# Altium PCB Altium_PCB_v03_02_PROTOCOL_ANALYZER_DUINO_4Plane.pcbdoc
Units mil, origin at the board's own origin, x right, y up, seen from the top; angles counter-clockwise.
Board outline 7547.34 x 3649.61 mil, 4 copper layers (Top Layer, GROUND, 5V, Bottom Layer); 17 components, 42 nets, 104 pads, 0 vias.
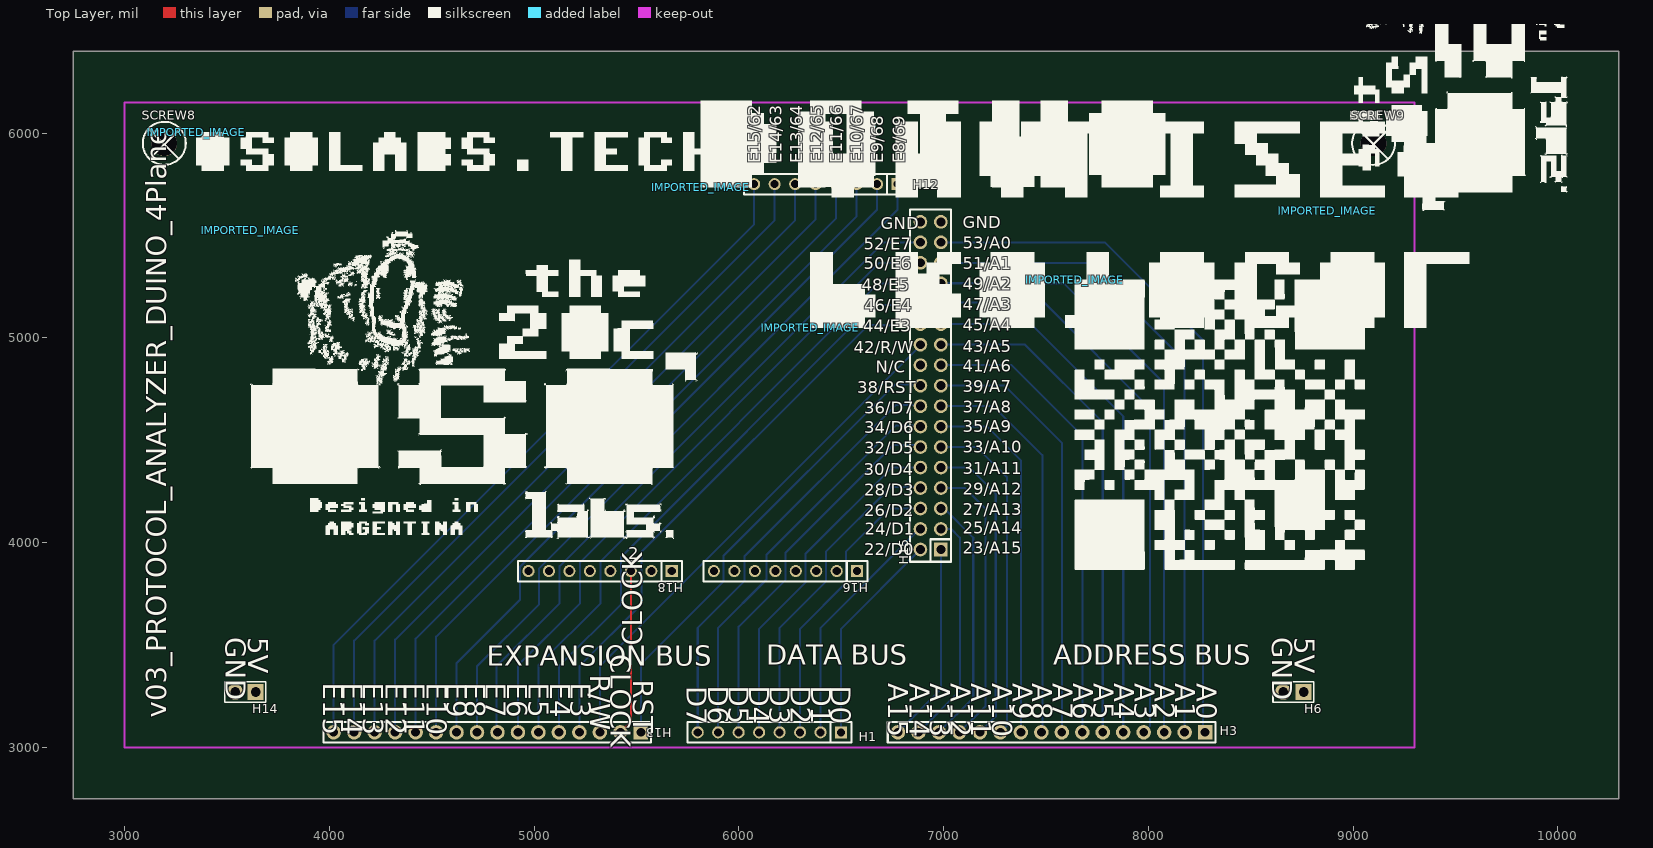
[diagram p0: Top Layer view]
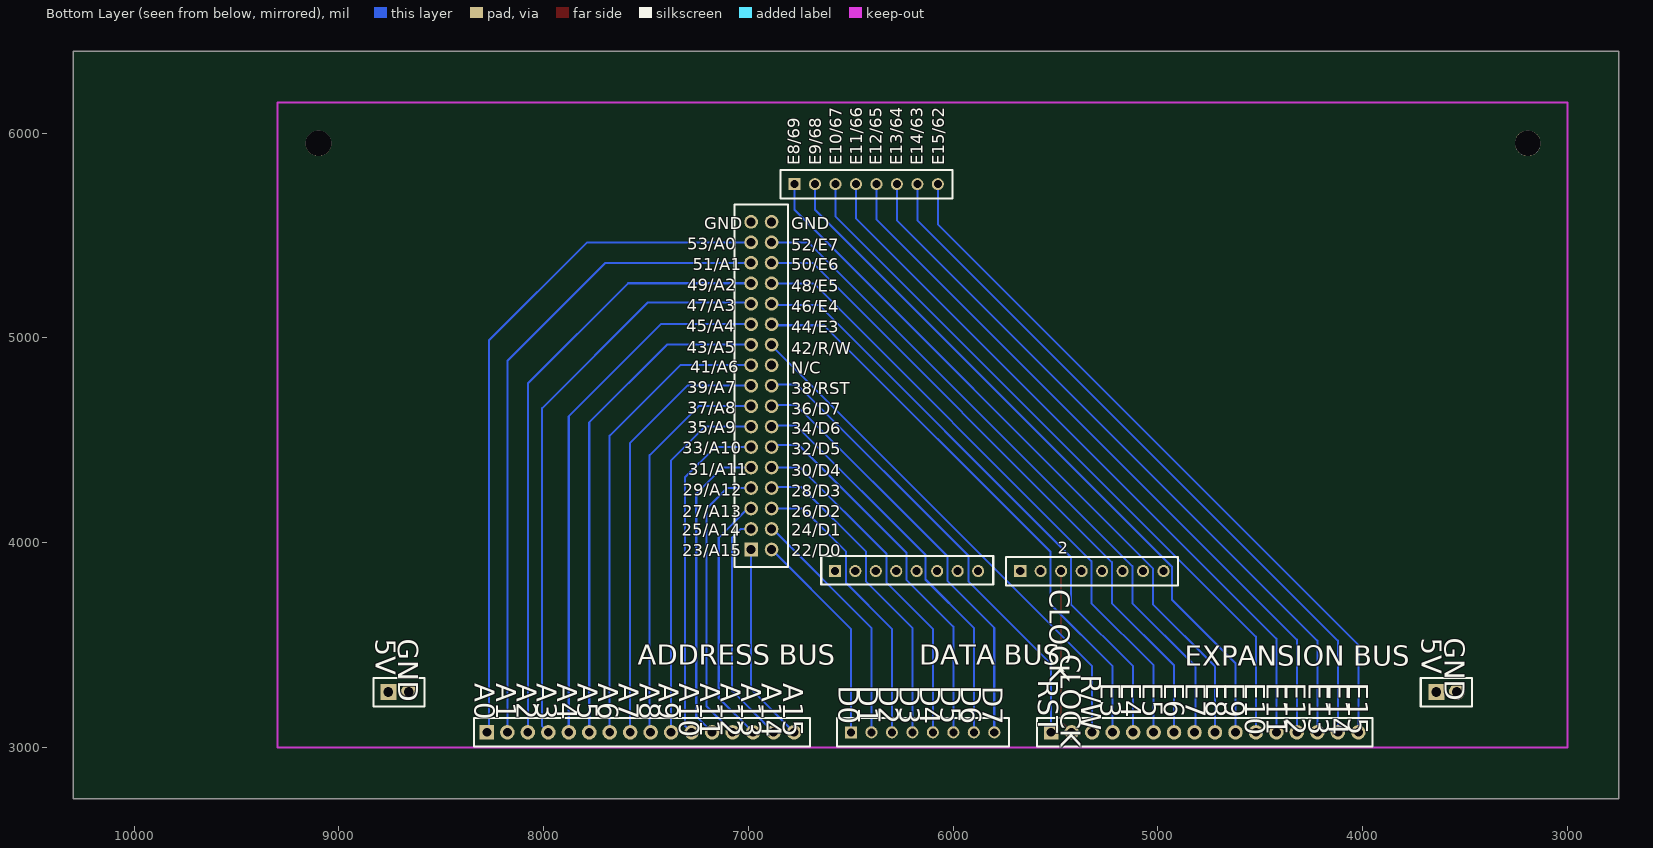
[diagram p1: Bottom Layer view, seen from below]
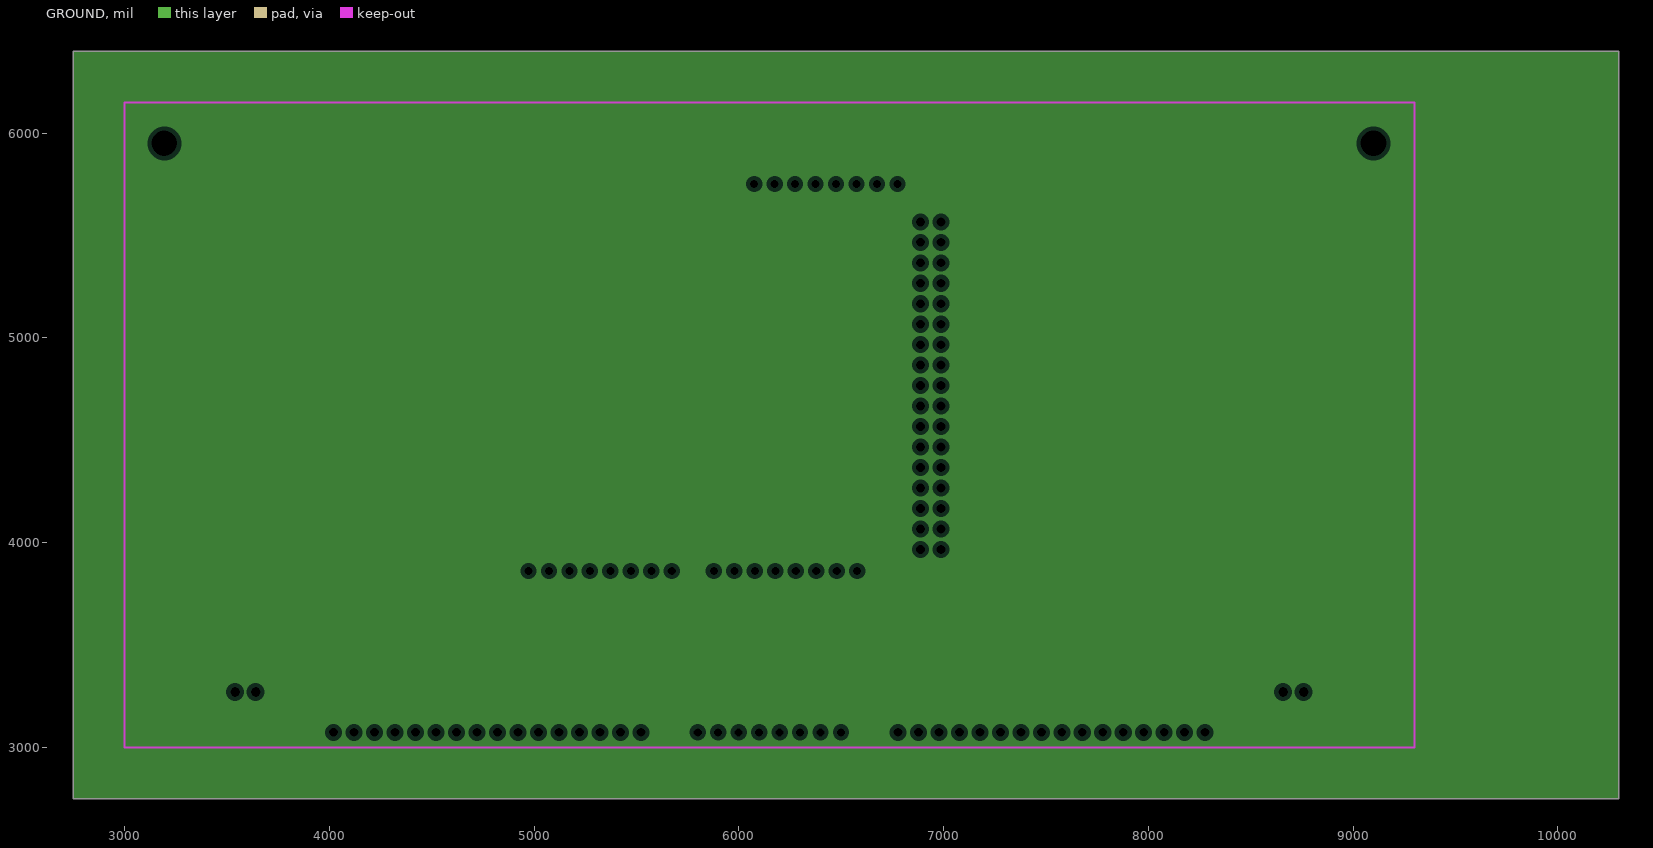
[diagram p2: GROUND, clearances drawn from the general rule]
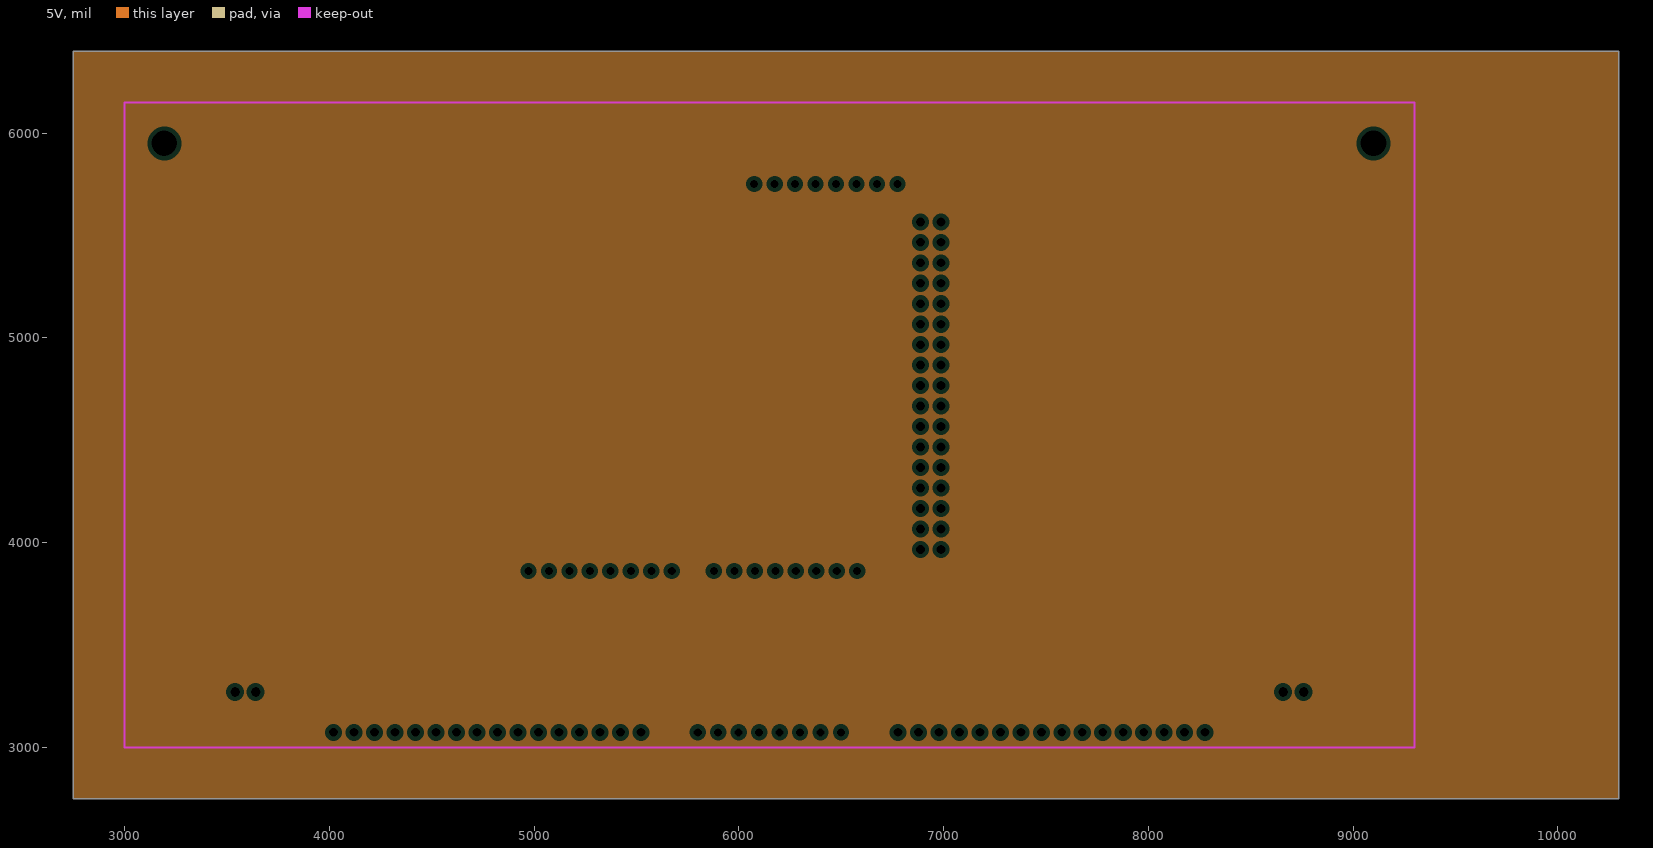
[diagram p3: 5V, clearances drawn from the general rule]

## Layer stack, top to bottom
Top Layer: signal copper (thickness not stored)
Dielectric: dielectric 12.6, FR-4, Dk 4.8
GROUND: plane copper (thickness not stored)
Dielectric: dielectric 12.6, FR-4, Dk 4.8
5V: plane copper (thickness not stored)
Dielectric: dielectric 12.6, FR-4, Dk 4.8
Bottom Layer: signal copper (thickness not stored)

## Board outline
10297.34,2750 2750,2750 2750,6399.61 10297.34,6399.61

## Design rules (kind name [scope] priority, off if disabled: settings)
BoardOutlineClearance copperThickness1oz [All] p0: genericclearance=10 ignorepadtopadclearanceinfootprint=FALSE except(0: Arc-SplitContinuation Track-SplitContinuation SMDPad-SplitContinuation THPad-SplitContinuation Via-SplitContinuation Fill-SplitContinuation Poly-SplitContinuation Region-SplitContinuation Text-SplitContinuation; 6: SMDPad-CutoutEdge THPad-CutoutEdge Via-CutoutEdge Fill-CutoutEdge Region-CutoutEdge; 11.8: Track-OutlineEdge SMDPad-OutlineEdge THPad-OutlineEdge Via-OutlineEdge Fill-OutlineEdge Region-OutlineEdge Poly-OutlineEdge Text-OutlineEdge Track-CutoutEdge)
BoardOutlineClearance copperThickness2oz [All] p0: genericclearance=10 ignorepadtopadclearanceinfootprint=FALSE except(0: Arc-SplitContinuation Track-SplitContinuation SMDPad-SplitContinuation THPad-SplitContinuation Via-SplitContinuation Fill-SplitContinuation Poly-SplitContinuation Region-SplitContinuation Text-SplitContinuation; 6: SMDPad-CutoutEdge THPad-CutoutEdge Via-CutoutEdge Fill-CutoutEdge Region-CutoutEdge; 11.8: Track-OutlineEdge SMDPad-OutlineEdge THPad-OutlineEdge Via-OutlineEdge Fill-OutlineEdge Region-OutlineEdge Poly-OutlineEdge Text-OutlineEdge Track-CutoutEdge)
Clearance copperThickness1oz [(InNet('A0') OR InNet('A1') OR InNet('A2') OR InNet('A3') OR InNet('A4') OR InNet('A5') OR InNet('A6') OR InNet('A7') OR InNet('A8') OR InNet('A9') OR InNet('A10') OR InNet('A11') OR InNet('A12') OR InNet('A13') OR InNet('A14') OR InNet('A15') OR InNet('5V') OR InNet('GROUND') OR InNet('D0') OR InNet('D1') OR InNet('D2') OR InNet('D3') OR InNet('D4') OR InNet('D5') OR InNet('D6') OR InNet('D7') OR InNet('RST') OR InNet('CLOCK') OR InNet('R/W') OR InNet('E3') OR InNet('E4') OR InNet('E5') OR InNet('E6') OR InNet('E7') OR InNet('E8') OR InNet('E9') OR InNet('E10') OR InNet('E11') OR InNet('E12') OR InNet('E13') OR InNet('E14') OR InNet('E15'))] p1: gap=7 ignorepadtopadclearanceinfootprint=FALSE except(4: Track-Track; 6: Track-SMDPad SMDPad-SMDPad Track-THPad SMDPad-THPad THPad-THPad Track-Via SMDPad-Via THPad-Via Via-Via Track-Fill SMDPad-Fill THPad-Fill Via-Fill Fill-Fill SMDPad-Region THPad-Region Via-Region Fill-Region Region-Region Track-Poly SMDPad-Poly THPad-Poly Via-Poly Fill-Poly Poly-Poly Track-Text SMDPad-Text THPad-Text Via-Text Fill-Text Region-Text Poly-Text Text-Text Track-Hole SMDPad-Hole THPad-Hole Via-Hole Fill-Hole Region-Hole Poly-Hole Text-Hole; 11.8: Track-Region Region-Poly Track-Sheet SMDPad-Sheet THPad-Sheet Via-Sheet Fill-Sheet Region-Sheet Poly-Sheet Text-Sheet Sheet-Hole)
Clearance copperThickness2oz [All] p1: gap=7 ignorepadtopadclearanceinfootprint=FALSE except(6: Track-SMDPad SMDPad-SMDPad Track-THPad SMDPad-THPad THPad-THPad Track-Via SMDPad-Via THPad-Via Via-Via Track-Fill SMDPad-Fill THPad-Fill Via-Fill Fill-Fill SMDPad-Region THPad-Region Via-Region Fill-Region Region-Region Track-Poly SMDPad-Poly THPad-Poly Via-Poly Fill-Poly Poly-Poly Track-Text SMDPad-Text THPad-Text Via-Text Fill-Text Region-Text Poly-Text Text-Text Track-Hole SMDPad-Hole THPad-Hole Via-Hole Fill-Hole Region-Hole Poly-Hole Text-Hole; 8: Track-Track; 11.8: Track-Region Region-Poly Track-Sheet SMDPad-Sheet THPad-Sheet Via-Sheet Fill-Sheet Region-Sheet Poly-Sheet Text-Sheet Sheet-Hole)
DiffPairsRouting differentialPair [All] p1: maxuncoupledlength=10 minlimit=5.9843 maxlimit=5.9843 mostfreqgap=5.9843 toplayer_minwidth=5 toplayer_prefwidth=10 toplayer_maxwidth=100 bottomlayer_minwidth=5 bottomlayer_prefwidth=10 bottomlayer_maxwidth=100
PasteMaskExpansion pasteMaskExpansion [All] p1: expansion=0
PlaneConnect innerPlane [All] p1: planeconnectstyle=Relief reliefexpansion=20 reliefentries=4 reliefconductorwidth=10 reliefairgap=10
PlaneConnect 5VPlane [All] p1: planeconnectstyle=Relief reliefexpansion=20 reliefentries=4 reliefconductorwidth=10 reliefairgap=10
PlaneConnect GroundPlane [All] p1: planeconnectstyle=Relief reliefexpansion=20 reliefentries=4 reliefconductorwidth=10 reliefairgap=10
PolygonConnect copperRegion [All] p1: connectstyle=Relief reliefentries=4 reliefconductorwidth=10 polygonreliefangle="90 Angle" airgapwidth=10
RoutingVias viaSize [All] p1: viastyle="Through Hole" holewidth=12.0078 minholewidth=11.811 maxholewidth=247.9922 width=24.0158 minwidth=19.685 maxwidth=393.7008
SolderMaskExpansion solderMaskExpansion [All] p1: useseparateexpansions=TRUE expansion=2.0079 expansionbottom=2.0079
Width copperThickness1oz [All] p1: maxlimit=100 minlimit=5 preferedwidth=10
Width copperThickness2oz [All] p1: maxlimit=100 minlimit=8 preferedwidth=10

## Components (designator, comment, footprint, x,y, rotation, side; value= is the part's Value field where it differs from the comment)
H1 "X6511WV-08H-C60D30" HDR-TH_8P-P2.54-V-M 6149.61,3073.74 r180 top
H3 "X6511WV-16H-C60D30_C725948" HDR-TH_16P-P2.54-V-M 7527.56,3073.74 r180 top
H6 "X6511WV-02H-C60D30" HDR-TH_2P-P2.54-V-M 8708.66,3270.59 r180 top
H12 "X6511WV-08H-C60D30" HDR-TH_8P-P2.54-V-M 6425.2,5750.91 r180 top
H13 "X6511WV-16H-C60D30_C725948" HDR-TH_16P-P2.54-V-M 4771.65,3073.74 r180 top
H14 "X6511WV-02H-C60D30" HDR-TH_2P-P2.54-V-M 3590.55,3270.59 r180 top
H15 "PZ254-2-17-Z-8.5" HDR-TH_34P-P2.54-V-M-R2-C17-S2.54 6937.01,4766.65 r90 top
H16 "X6511WV-08H-C60D30" HDR-TH_8P-P2.54-V-M 6228.35,3861.14 r180 top
H18 "X6511WV-08H-C60D30" HDR-TH_8P-P2.54-V-M 5322.83,3861.14 r180 top
IMPORTED_IMAGE "IMPORTED_IMAGE" IMPORTED_IMAGE 3350,6004.61 r0 top
IMPORTED_IMAGE "IMPORTED_IMAGE" IMPORTED_IMAGE 7640,5284.61 r0 top
IMPORTED_IMAGE "IMPORTED_IMAGE" IMPORTED_IMAGE 8875,5619.61 r0 top
IMPORTED_IMAGE "IMPORTED_IMAGE" IMPORTED_IMAGE 3615,5524.61 r0 top
IMPORTED_IMAGE "IMPORTED_IMAGE" IMPORTED_IMAGE 6350,5049.61 r0 top
IMPORTED_IMAGE "IMPORTED_IMAGE" IMPORTED_IMAGE 5815,5734.61 r0 top
SCREW8 "Screw-Hole-M3" Screw-Hole-M3 3196.85,5947.76 r0 top
SCREW9 "Screw-Hole-M3" Screw-Hole-M3 9102.36,5947.76 r0 top

## Footprints (in the part's own frame and the unit in brackets; to place one, negate y for a bottom-side part, rotate by r counter-clockwise, add the part's x,y. Pads: shape width x height; smd on the part's side, far side on the other; paste and mask are expansions set on the pad)
HDR-TH_2P-P2.54-V-M [mm]
  rect 2x2 hole 1.2: 1(-1.27,0)
  round 2 hole 1.2: 2(1.27,0)
  silkscreen extent -2.54,-1.27 2.54,1.27
HDR-TH_8P-P2.54-V-M [mm]
  rect 1.5x1.5 hole 1: 1(-8.89,0)
  round 1.5 hole 1: 2(-6.35,0) 3(-3.81,0) 4(-1.27,0) 5(1.27,0) 6(3.81,0) 7(6.35,0) 8(8.89,0)
  silkscreen extent -10.16,-1.27 10.16,1.27
HDR-TH_16P-P2.54-V-M [mm]
  rect 1.8x1.8 hole 1.1: 1(-19.05,0)
  round 1.8 hole 1.1: 2(-16.51,0) 3(-13.97,0) 4(-11.43,0) 5(-8.89,0) 6(-6.35,0) 7(-3.81,0) 8(-1.27,0) 9(1.27,0) 10(3.81,0) 11(6.35,0) 12(8.89,0) 13(11.43,0) 14(13.97,0) 15(16.51,0) 16(19.05,0)
  silkscreen extent -20.32,-1.27 20.32,1.27
HDR-TH_34P-P2.54-V-M-R2-C17-S2.54 [mm]
  rect 1.7x1.7 hole 1.1: 1(-20.32,-1.27)
  round 1.7 hole 1.1: 2(-20.32,1.27) 3(-17.78,-1.27) 4(-17.78,1.27) 5(-15.24,-1.27) 6(-15.24,1.27) 7(-12.7,-1.27) 8(-12.7,1.27) 9(-10.16,-1.27) 10(-10.16,1.27) 11(-7.62,-1.27) 12(-7.62,1.27) 13(-5.08,-1.27) 14(-5.08,1.27) 15(-2.54,-1.27) 16(-2.54,1.27) 17(0,-1.27) 18(0,1.27) 19(2.54,-1.27) 20(2.54,1.27) 21(5.08,-1.27) 22(5.08,1.27) 23(7.62,-1.27) 24(7.62,1.27) 25(10.16,-1.27) 26(10.16,1.27) 27(12.7,-1.27) 28(12.7,1.27) 29(15.24,-1.27) 30(15.24,1.27) 31(17.78,-1.27) 32(17.78,1.27) 33(20.32,-1.27) 34(20.32,1.27)
  silkscreen extent -21.84,-2.54 21.84,2.54
IMPORTED_IMAGE [mil]
  silkscreen extent 0,-188 2540,0
Screw-Hole-M3 [mil]
  round 126 hole 126: 1(-2.5,2.5)
  silkscreen extent -107,-102 102,107

## Nets (pads, with @x,y where several pads share a name; then routed paths per layer and width w, separated by ;. In a path a pad name is that pad's centre, name@x,y a point inside that pad or via, vN(x,y) a via of type N, cw(c..) or ccw(c..) an arc to the next point about the centre after c; other vN are vias at no path point)
5V: H6.1 H14.1
A0: H3.1 H15.31 | length 3396.7
  Bottom Layer w10: H15.31 7787.95,5466.65 8267.56,4987.05 8267.56,3083.74 H3.1
A1: H3.2 H15.29 | length 3202.5
  Bottom Layer w10: H15.29 7697.95,5366.65 8177.56,4887.05 H3.2
A2: H3.3 H15.27 | length 2996.7
  Bottom Layer w10: H15.27 7587.95,5266.65 8077.56,4777.05 H3.3
A3: H3.4 H15.25 | length 2831.5
  Bottom Layer w10: H15.25 6992,5171.65 7492.95,5171.65 8007.56,4657.05 8007.56,3103.74 H3.4
A4: H3.5 H15.23 | length 2620.1
  Bottom Layer w10: H15.23 7427.95,5066.65 7877.56,4617.05 H3.5
A5: H3.6 H15.21 | length 2461.1
  Bottom Layer w10: H15.21 7397.95,4966.65 7777.56,4587.05 H3.6
A6: H3.7 H15.19 | length 2281.6
  Bottom Layer w10: H15.19 7332.95,4866.65 7677.56,4522.05 H3.7
A7: H3.8 H15.17 | length 2119.7
  Bottom Layer w10: H15.17 7297.95,4766.65 7577.56,4487.05 H3.8
A8: H3.9 H15.15 | length 1950.2
  Bottom Layer w10: H15.15 7242.95,4666.65 7482.56,4427.05 7482.56,3078.74 H3.9
A9: H3.10 H15.13 | length 1787
  Bottom Layer w10: H15.13 7212.95,4566.65 7377.56,4402.05 H3.10
A10: H3.11 H15.11 | length 1643.2
  Bottom Layer w10: H15.11 7162.95,4466.65 7310,4319.61 7310,3106.18 H3.11
A11: H3.12 H15.9 | length 1518.6
  Bottom Layer w10: H15.9 7127.95,4366.65 7255,4239.61 7255,3151.18 H3.12
A12: H3.13 H15.7 | length 1403.9
  Bottom Layer w10: H15.7 7102.95,4266.65 7205,4164.61 7205,3201.18 H3.13
A13: H3.14 H15.5 | length 1237.1
  Bottom Layer w10: H3.14 7145,3241.18 7145,4024.61 7002.95,4166.65 H15.5
A14: H3.15 H15.3 | length 1145.1
  Bottom Layer w10: H3.15 7080,3276.18 7080,4024.61 7037.95,4066.65 H15.3
A15: H3.16 H15.1 | length 979.7
  Bottom Layer w10: H3.16 6987.01,3283.19 H15.1
CLOCK: H13.2 H18.3 | length 808.6
  Top Layer w10: H13.2 5472.83,3124.92 H18.3
D0: H1.1 H15.2 | length 1053.4
  Bottom Layer w10: H1.1 6499.61,3579.26 H15.2
D1: H1.2 H15.4 | length 1199.8
  Bottom Layer w10: H1.2 6399.61,3584.21 H15.4@6887.01,4071.61
D2: H1.3 H15.6 | length 1425.1
  Bottom Layer w10: H1.3 6299.61,3579.21 6523.18,3802.79 6523.18,3954.61 6735.19,4166.61 H15.6@6887.01,4166.61
D3: H1.4 H15.8 | length 1567.5
  Bottom Layer w10: H1.4 6199.61,3584.21 6425,3809.61 6425,3954.61 6742.01,4271.61 H15.8@6887.01,4271.61
D4: H1.5 H15.10 | length 1701
  Bottom Layer w10: H1.5 6099.61,3579.21 6324.99,3804.59 6325,3944.61 6747.01,4366.61 H15.10@6887.01,4366.61
D5: H1.6 H15.12 | length 1848.1
  Bottom Layer w10: H1.6 5999.61,3589.21 6227.5,3817.1 6227.5,3949.61 6754.5,4476.61 H15.12@6887.01,4476.61
D6: H1.7 H15.14 | length 1977.2
  Bottom Layer w10: H1.7 5899.61,3584.21 6135.58,3820.19 6135.58,3940.19 6767.01,4571.61 H15.14@6887.01,4571.61
D7: H1.8 H15.16 | length 2118.6
  Bottom Layer w10: H1.8 5799.61,3584.21 6027.51,3812.12 6027.51,3932.12 6767.01,4671.61 H15.16@6887.01,4671.61
E3: H13.4 H15.24 | length 2827.1
  Bottom Layer w10: H13.4 5221.65,3396.26 5525,3699.61 5525,3954.61 6632.01,5061.61 H15.24@6887.01,5061.61
E4: H13.5 H15.26 | length 2953.8
  Bottom Layer w10: H13.5 5121.65,3396.26 5425.42,3700.03 5425.42,3930.03 6657.01,5161.61 H15.26@6887.01,5161.61
E5: H13.6 H15.28 | length 3085.6
  Bottom Layer w10: H13.6 5021.65,3401.26 5325,3704.61 5325,3909.61 6682.01,5266.61 H15.28@6887.01,5266.61
E6: H13.7 H15.30 | length 3224.1
  Bottom Layer w10: H13.7 4921.65,3401.26 5225,3704.61 5225,3904.61 6687.01,5366.61 H15.30@6887.01,5366.61
E7: H13.8 H15.32 | length 3358
  Bottom Layer w10: H13.8 4816.65,3078.74 4816.65,3396.3 5125,3704.65 5125,3884.61 6707.05,5466.65 H15.32
E8: H12.1 H13.9 | length 3527.8
  Bottom Layer w10: H13.9 4721.65,3396.26 5025,3699.61 5025,3874.61 6775.2,5624.8 H12.1
E9: H12.2 H13.10 | length 3527.8
  Bottom Layer w10: H13.10 4621.65,3411.26 4931.7,3721.3 4931.7,3881.3 6675.2,5624.8 H12.2
E10: H12.3 H13.11 | length 3527.8
  Bottom Layer w10: H13.11 4521.65,3541.26 6575.2,5594.8 H12.3
E11: H12.4 H13.12 | length 3527.8
  Bottom Layer w10: H13.12 4421.65,3531.26 6475.2,5584.8 H12.4
E12: H12.5 H13.13 | length 3527.8
  Bottom Layer w10: H13.13 4321.65,3526.26 6375.2,5579.8 H12.5
E13: H12.6 H13.14 | length 3527.8
  Bottom Layer w10: H13.14 4221.65,3521.26 6275.2,5574.8 H12.6
E14: H12.7 H13.15 | length 3527.8
  Bottom Layer w10: H13.15 4121.65,3521.26 6175.2,5574.8 H12.7
E15: H12.8 H13.16 | length 3527.8
  Bottom Layer w10: H13.16 4021.65,3500.51 6075.2,5554.06 H12.8
GROUND: H6.2 H14.2 H15.33 H15.34
R/W: H13.3 H15.22 | length 2536.3
  Bottom Layer w10: H13.3 5321.65,3396.26 H15.22@6887.01,4961.61
RST: H13.1 H15.18 | length 2336.6
  Bottom Layer w10: H13.1 5521.65,3406.26 5925,3809.61 5925,3934.61 6762.01,4771.61 H15.18@6887.01,4771.61
pads on no net: H15.20 H16.1 H16.2 H16.3 H16.4 H16.5 H16.6 H16.7 H16.8 H18.1 H18.2 H18.4 H18.5 H18.6 H18.7 H18.8 SCREW8.1 SCREW9.1

## Keep-outs
Board Outline Layer:
  lines w10: 3000,3000 9299.21,3000 9299.21,6149.61 3000,6149.61 3000,3000

## Silkscreen, mask and mechanical layers (free items; w line width, h text height)
Top Silkscreen Layer:
  text "E15/62" at 6104.53,5853.66 h59.06 r90
  text "E14/63" at 6209.53,5853.66 h59.06 r90
  text "E13/64" at 6309.53,5853.66 h59.06 r90
  text "E12/65" at 6409.53,5853.66 h59.06 r90
  text "E11/66" at 6504.53,5853.66 h59.06 r90
  text "E10/67" at 6604.53,5853.66 h59.06 r90
  text "E9/68" at 6704.53,5853.66 h59.06 r90
  text "E8/69" at 6809.53,5853.66 h59.06 r90
  text "GND" at 7095,5534.61 h59.06
  text "GND" at 6693,5529.61 h59.06
  text "53/A0" at 7095,5434.61 h59.06
  text "52/E7" at 6609.2,5429.61 h59.06
  text "50/E6" at 6610,5334.61 h59.06
  text "51/A1" at 7095,5334.61 h59.06
  text "49/A2" at 7095,5234.61 h59.06
  text "48/E5" at 6601,5229.61 h59.06
  text "47/A3" at 7095,5134.61 h59.06
  text "46/E4" at 6613.8,5129.61 h59.06
  text "45/A4" at 7095,5034.61 h59.06
  text "44/E3" at 6609,5029.61 h59.06
  text "43/A5" at 7095,4929.61 h59.06
  text "42/R/W" at 6562.2,4924.61 h59.06
  text "41/A6" at 7095,4834.61 h59.06
  text "N/C" at 6670,4829.61 h59.06
  text "39/A7" at 7095,4734.61 h59.06
  text "38/RST" at 6578.8,4729.61 h59.06
  text "37/A8" at 7095,4634.61 h59.06
  text "36/D7" at 6613.8,4629.61 h59.06
  text "35/A9" at 7095,4539.61 h59.06
  text "34/D6" at 6612.2,4534.61 h59.06
  text "33/A10" at 7095,4439.61 h59.06
  text "32/D5" at 6612.2,4434.61 h59.06
  text "31/A11" at 7095,4334.61 h59.06
  text "30/D4" at 6610.6,4329.61 h59.06
  text "29/A12" at 7095,4234.61 h59.06
  text "28/D3" at 6612.2,4229.61 h59.06
  text "27/A13" at 7095,4134.61 h59.06
  text "26/D2" at 6613.8,4129.61 h59.06
  text "25/A14" at 7095,4044.61 h59.06
  text "24/D1" at 6615,4039.61 h59.06
  text "23/A15" at 7095,3944.61 h59.06
  text "22/D0" at 6612.2,3939.61 h59.06
  text "2" at 5460,3919.61 h59.06
  text "GND" at 3494.54,3538.85 h98.43 r270
  text "5V" at 3604.54,3538.85 h98.43 r270
  text "GND" at 8604.54,3538.85 h98.43 r270
  text "5V" at 8714.54,3538.85 h98.43 r270
  text "CLOCK" at 5527.83,3496.87 h98.43 r90
  text "CLOCK" at 5375,3454.61 h98.43 r270
  text "DATA BUS" at 6135,3404.61 h98.43
  text "ADDRESS BUS" at 7535,3404.61 h98.43
  text "EXPANSION BUS" at 4770,3399.61 h98.43
  text "R/W" at 5275,3354.61 h98.43 r270
  text "RST" at 5485,3329.61 h98.43 r270
  text "E15" at 3970,3314.61 h98.43 r270
  text "E14" at 4065,3314.61 h98.43 r270
  text "E13" at 4165,3314.61 h98.43 r270
  text "E12" at 4275,3314.61 h98.43 r270
  text "E11" at 4370,3314.61 h98.43 r270
  text "E10" at 4475,3314.61 h98.43 r270
  text "E9" at 4575,3314.61 h98.43 r270
  text "E8" at 4665,3314.61 h98.43 r270
  text "E7" at 4765,3314.61 h98.43 r270
  text "E6" at 4870,3314.61 h98.43 r270
  text "E5" at 4975,3314.61 h98.43 r270
  text "E4" at 5080,3314.61 h98.43 r270
  text "E3" at 5180,3314.61 h98.43 r270
  text "A15" at 6729.54,3313.85 h98.43 r270
  text "A14" at 6834.54,3313.85 h98.43 r270
  text "A13" at 6934.54,3313.85 h98.43 r270
  text "A12" at 7034.54,3313.85 h98.43 r270
  text "A11" at 7134.54,3313.85 h98.43 r270
  text "A10" at 7237.04,3313.85 h98.43 r270
  text "A9" at 7337.04,3313.85 h98.43 r270
  text "A8" at 7432.04,3313.85 h98.43 r270
  text "A7" at 7534.54,3313.85 h98.43 r270
  text "A6" at 7634.54,3313.85 h98.43 r270
  text "A5" at 7734.54,3313.85 h98.43 r270
  text "A4" at 7834.54,3313.85 h98.43 r270
  text "A3" at 7934.54,3313.85 h98.43 r270
  text "A2" at 8032.04,3313.85 h98.43 r270
  text "A1" at 8132.04,3313.85 h98.43 r270
  text "A0" at 8237.04,3313.85 h98.43 r270
  text "D6" at 5850.79,3302.05 h98.43 r270
  text "D5" at 5950.79,3302.05 h98.43 r270
  text "D4" at 6050.79,3302.05 h98.43 r270
  text "D3" at 6150.79,3302.05 h98.43 r270
  text "D2" at 6253.29,3302.05 h98.43 r270
  text "D1" at 6353.29,3302.05 h98.43 r270
  text "D0" at 6448.29,3302.05 h98.43 r270
  text "D7" at 5745,3299.61 h98.43 r270
  text "v03_PROTOCOL_ANALYZER_DUINO_4Plane" at 3205,3144.61 h98.43 r90
Bottom Silkscreen Layer:
  lines w10: 3466.75,3199.21 3716.75,3199.21 3716.75,3339.21 3466.75,3339.21 3466.75,3199.21 ; 3951.47,3004.61 5591.47,3004.61 5591.47,3144.61 3951.47,3144.61 3951.47,3004.61 ; 4901.83,3790.03 5741.83,3790.03 5741.83,3930.03 4901.83,3930.03 4901.83,3790.03 ; 5728.26,3004.61 6568.26,3004.61 6568.26,3144.61 5728.26,3144.61 5728.26,3004.61 ; 5804.57,3794.61 6644.57,3794.61 6644.57,3934.61 5804.57,3934.61 5804.57,3794.61 ; 6004.57,5679.61 6844.57,5679.61 6844.57,5819.61 6004.57,5819.61 6004.57,5679.61 ; 6700,3004.61 8340,3004.61 8340,3144.61 6700,3144.61 6700,3004.61 ; 6807.5,3882.11 6807.5,5652.11 7067.5,5652.11 7067.5,3882.11 6807.5,3882.11 ; 8581.75,3199.21 8831.75,3199.21 8831.75,3339.21 8581.75,3339.21 8581.75,3199.21
  text "E15/62" at 6044.53,5843.66 h59.06 r270
  text "E14/63" at 6149.53,5843.66 h59.06 r270
  text "E13/64" at 6249.53,5843.66 h59.06 r270
  text "E12/65" at 6349.53,5843.66 h59.06 r270
  text "E11/66" at 6444.53,5843.66 h59.06 r270
  text "E10/67" at 6544.53,5843.66 h59.06 r270
  text "E9/68" at 6644.53,5843.66 h59.06 r270
  text "E8/69" at 6749.53,5843.66 h59.06 r270
  text "GND" at 6790,5529.61 h59.06
  text "GND" at 7215.8,5529.61 h59.06
  text "53/A0" at 7299.8,5429.61 h59.06
  text "52/E7" at 6790,5424.61 h59.06
  text "50/E6" at 6790,5329.61 h59.06
  text "51/A1" at 7271,5329.61 h59.06
  text "49/A2" at 7299.8,5229.61 h59.06
  text "48/E5" at 6790,5224.61 h59.06
  text "47/A3" at 7301.4,5129.61 h59.06
  text "46/E4" at 6790,5124.61 h59.06
  text "45/A4" at 7303,5029.61 h59.06
  text "44/E3" at 6790,5024.61 h59.06
  text "43/A5" at 7301.4,4924.61 h59.06
  text "42/R/W" at 6790,4919.61 h59.06
  text "41/A6" at 7285.4,4829.61 h59.06
  text "N/C" at 6790,4824.61 h59.06
  text "39/A7" at 7298.2,4729.61 h59.06
  text "38/RST" at 6790,4724.61 h59.06
  text "37/A8" at 7299.8,4629.61 h59.06
  text "36/D7" at 6790,4624.61 h59.06
  text "35/A9" at 7298.2,4534.61 h59.06
  text "34/D6" at 6790,4529.61 h59.06
  text "33/A10" at 7323.4,4434.61 h59.06
  text "32/D5" at 6790,4429.61 h59.06
  text "31/A11" at 7294.6,4329.61 h59.06
  text "30/D4" at 6790,4324.61 h59.06
  text "29/A12" at 7321.8,4229.61 h59.06
  text "28/D3" at 6790,4224.61 h59.06
  text "26/D2" at 6790,4124.61 h59.06
  text "27/A13" at 7323.4,4124.61 h59.06
  text "24/D1" at 6790,4034.61 h59.06
  text "25/A14" at 7325,4034.61 h59.06
  text "2" at 5490,3944.61 h59.06
  text "22/D0" at 6790,3934.61 h59.06
  text "23/A15" at 7323.4,3934.61 h59.06
  text "CLOCK" at 5527.83,3771.36 h98.43 r90
  text "GND" at 3600.79,3535.9 h98.43 r90
  text "5V" at 3710.79,3535.9 h98.43 r90
  text "GND" at 8710.79,3530.9 h98.43 r90
  text "5V" at 8820.79,3530.9 h98.43 r90
  text "CLOCK" at 5475,3454.61 h98.43 r90
  text "DATA BUS" at 6165,3404.61 h98.43
  text "ADDRESS BUS" at 7540,3404.61 h98.43
  text "EXPANSION BUS" at 4870,3399.61 h98.43
  text "R/W" at 5375,3354.61 h98.43 r90
  text "RST" at 5585,3329.61 h98.43 r90
  text "E15" at 4070,3314.61 h98.43 r90
  text "E14" at 4165,3314.61 h98.43 r90
  text "E13" at 4265,3314.61 h98.43 r90
  text "E12" at 4375,3314.61 h98.43 r90
  text "E11" at 4470,3314.61 h98.43 r90
  text "E10" at 4575,3314.61 h98.43 r90
  text "E9" at 4675,3314.61 h98.43 r90
  text "E8" at 4765,3314.61 h98.43 r90
  text "E7" at 4865,3314.61 h98.43 r90
  text "E6" at 4970,3314.61 h98.43 r90
  text "E5" at 5075,3314.61 h98.43 r90
  text "E4" at 5180,3314.61 h98.43 r90
  text "E3" at 5280,3314.61 h98.43 r90
  text "A15" at 6829.54,3313.85 h98.43 r90
  text "A14" at 6934.54,3313.85 h98.43 r90
  text "A13" at 7034.54,3313.85 h98.43 r90
  text "A12" at 7134.54,3313.85 h98.43 r90
  text "A11" at 7234.54,3313.85 h98.43 r90
  text "A10" at 7337.04,3313.85 h98.43 r90
  text "A9" at 7437.04,3313.85 h98.43 r90
  text "A8" at 7532.04,3313.85 h98.43 r90
  text "A7" at 7634.54,3313.85 h98.43 r90
  text "A6" at 7734.54,3313.85 h98.43 r90
  text "A5" at 7834.54,3313.85 h98.43 r90
  text "A4" at 7934.54,3313.85 h98.43 r90
  text "A3" at 8034.54,3313.85 h98.43 r90
  text "A2" at 8132.04,3313.85 h98.43 r90
  text "A1" at 8232.04,3313.85 h98.43 r90
  text "A0" at 8337.04,3313.85 h98.43 r90
  text "D6" at 5960.79,3302.05 h98.43 r90
  text "D5" at 6060.79,3302.05 h98.43 r90
  text "D4" at 6160.79,3302.05 h98.43 r90
  text "D3" at 6260.79,3302.05 h98.43 r90
  text "D2" at 6363.29,3302.05 h98.43 r90
  text "D1" at 6463.29,3302.05 h98.43 r90
  text "D0" at 6558.29,3302.05 h98.43 r90
  text "D7" at 5855,3299.61 h98.43 r90